# Altium PCB MB1419.PcbDoc (part 2 of 2)
Units mil, origin at the board's own origin, x right, y up, seen from the top; angles counter-clockwise.
Board outline 787.48 x 1614.17 mil, 4 copper layers (Top Layer, Signal Layer 3, Signal Layer 4, Bottom Layer), stack 43.307 mil thick; 117 components, 71 nets, 371 pads, 280 vias.
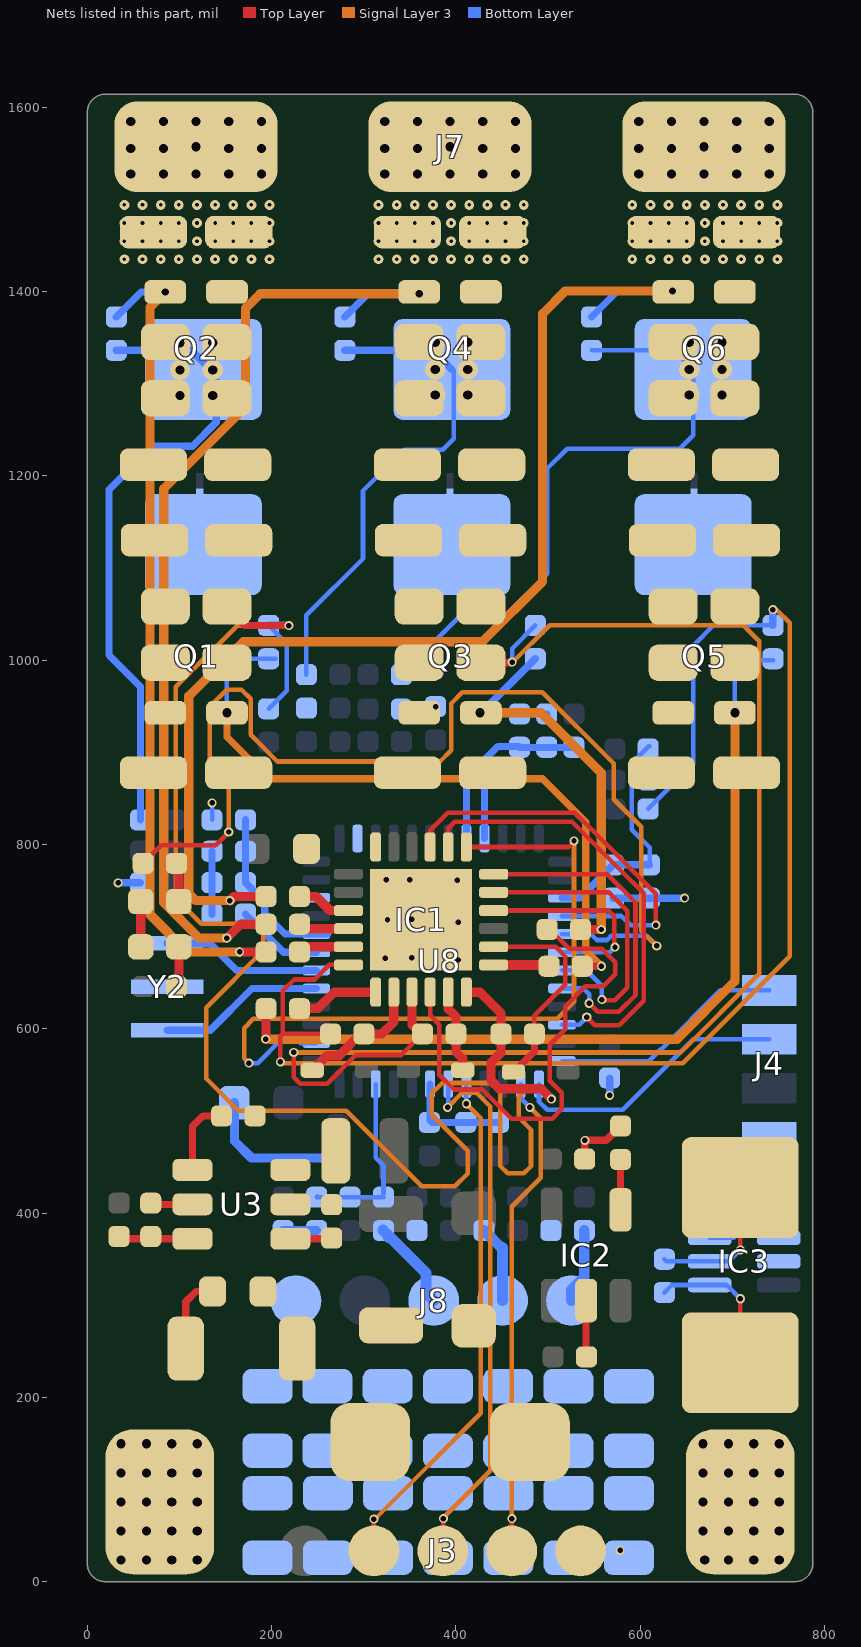
[diagram p4: the nets of this part, all layers, seen from the top]

## Via types
v1: diameter 10.63, hole 3.94, Top Layer to Bottom Layer, tented both sides, 108 vias
v2: diameter 22/22/22/22 (per signal layer), hole 10, Top Layer to Bottom Layer, tented both sides, 100 vias
v3: diameter 9.84, hole 5.91, Top Layer to Bottom Layer, tented both sides, 66 vias
v4: diameter 22, hole 10, Top Layer to Bottom Layer, tented both sides, 3 vias
v5: diameter 17.72, hole 7.87, Top Layer to Bottom Layer, tented both sides, 3 vias

## Nets (pads, with @x,y where several pads share a name; then routed paths per layer and width w, separated by ;. In a path a pad name is that pad's centre, name@x,y a point inside that pad or via, vN(x,y) a via of type N, cw(c..) or ccw(c..) an arc to the next point about the centre after c; other vN are vias at no path point) (continued)
GND: C4.2 C6.1 C18.2 C19.1 C20.2 C21.2 C23.2 C24.2 C25.2 C26.2 C27.1 C28.1 C29.1 C30.1 C31.1 C32.1 C33.1 C34.1 C35.1 C36.1 C37.1 C38.1 C39.1 C40.1 C41.2 C44.2 C45.1 C55.2 C63.2 C64.2 C66.2 C67.2 C68.2 C69.2 C70.2 D2.2 D4.C D5.C D7.A IC1.6 IC1.25 IC2.2 IC3.1 IC3.2 J3.5 J4.4 J6.1 J8.5 JP1.2 JP2.2 JP3.2 R33.1 R54.2 R55.2 R56.2 R60.2 R76.2 R80.1 R81.1 R82.1 U3.2 U8.49 Y2.2 | length 723.6
  Top Layer w5: J3.5@535,34 535.43,33.57 J3.5@535.43,33.46
  Top Layer w7.87: R33.1@68.9,410.83 70.26,409.47 U3.2@114.19,409.47 ; C44.2@106.89,252.95 106.89,303.74 118.11,314.96 C41.2@136.02,314.96 ; C63.2@539.8,458.66 539.8,478.8 v3(540,479) 563.28,479 C4.2@578.77,494.49 ; IC2.2@541.34,305.12 541.34,244.49 C64.2@541.73,244.09
  Top Layer w10: D5.C@58.07,688.98 D4.C@58.07,738.19
  Bottom Layer w7.87: v3(33.46,758.3) 33.7,758.53 R80.1@57.86,758.53 ; C21.2@135.43,724.41 C23.2@135.43,758.53 R76.2@135.43,792.65 ; C25.2@468.48,941.86 468.6,941.73 C25.2@469.14,941.73 C26.2@498.59,941.73 ; v3(566.93,527.84) C20.2@566.93,546.79 ; C66.2@570.87,741.73 R60.2@610.24,741.73 v3(648.25,741.73)
  Bottom Layer w10: C19.1@159.65,519.68 159.65,478.35 178.16,459.84 C18.2@271.65,459.84 ; C70.2@212.6,381.04 C69.2@248.91,381.04
  other v2: 36.59,23.62 64.15,23.62 91.71,23.62 119.27,23.62 36.59,55.12 64.15,55.12 91.71,55.12 119.27,55.12 36.59,86.61 64.15,86.61 91.71,86.61 119.27,86.61 36.59,118.11 64.15,118.11 91.71,118.11 119.27,118.11 36.59,149.61 64.15,149.61 91.71,149.61 119.27,149.61
  other v3: 578.31,34 402.45,674.67 323.54,676.49 352.3,676.95 402.62,715.5 325.82,718.24 351.88,718.7 324.59,761.53 349.75,761.71 401.42,761.25
GPIO_BEMF: R57.2 R58.2 R59.2 U8.43 | length 114.5
  Bottom Layer w7.87: U8.43@372.05,539.96 372.05,500.39 374.02,498.43 R58.2@410.7,498.43 R59.2@446.13,498.43
HO1: IC1.19 R5.1 | length 60.7
  Top Layer w7.87: R5.1@499.53,669.31 R5.1@500.99,667.86
  Top Layer w11: IC1.19@440.93,669.31 R5.1@499.53,669.31
HO2: IC1.16 R7.1 | length 545.1
  Top Layer w5: IC1.16@372.03,639.78 372.03,614.7 382.15,604.58 382.15,549.95 398,534.1 428.77,534.1 460.37,502.5 504.4,502.5 515.03,513.13 515.03,530.5 501.84,543.69 501.84,582.66 518.5,599.32 518.5,624 540.5,646 560,646 573,659 573,672.32 558.32,687 522.94,687 502.19,707.75 R7.1@499.05,707.75
HO3: IC1.13 R9.1 | length 92
  Top Layer w10: R9.1@228.35,622.05 250.28,622.05 268.01,639.78 IC1.13@312.98,639.78
LO1: IC1.11 R6.1 | length 55.4
  Top Layer w10: R6.1@230.31,683.43 235.88,688.99 IC1.11@283.45,688.99
LO2: IC1.10 R8.1 | length 58.2
  Top Layer w10: R8.1@225.2,708.68 264.84,708.68 IC1.10@283.45,708.68
LO3: IC1.9 R10.1 | length 59.4
  Top Layer w10: R10.1@230.31,743.51 248.22,743.51 263.37,728.36 IC1.9@283.45,728.36
NetC3_1: C3.1 L2.1 U3.6
NetC3_2: C3.2 U3.1 | length 83.6
  Top Layer w7.87: U3.1@114.19,446.87 114.19,494.19 125.51,505.51 C3.2@145.79,505.51
NetC4_1: C4.1 IC2.4 | length 54.7
  Top Layer w7.87: IC2.4@578.74,403.54 C4.1@578.77,458.27
NetC25_1: C25.1 C26.1 L1.2 U8.20 U8.21 | length 284.4
  Bottom Layer w7.87: U8.20@411.42,806.5 411.42,872.27 431.1,891.95 ; U8.21@431.1,806.5 431.1,891.95 ; L1.2@529.98,905.31 469.34,905.31 C25.1@469.14,905.51 468.18,906.47 445.62,906.47 431.1,891.95
NetD4_A: D4.A R28.2 | length 42.4
  Top Layer w10: R28.2@96.85,779.53 99.41,776.97 D4.A@99.41,738.19
NetD5_A: D5.A R29.2 | length 44.4
  Top Layer w10: R29.2@96.85,645.67 99.41,648.23 D5.A@99.41,688.98
NetIC3_6: IC3.6 R3.2 | length 77.2
  Bottom Layer w5: IC3.6@675.44,373.17 701.71,373.17 R3.2@737.75,409.2
NetJ8_1: J8.1 R74.1 | length 81.6
  Bottom Layer w11.81: J8.1@525.59,305.12 525.59,316.84 539.37,330.62 R74.1@539.37,381.04
NetJ8_2: J8.2 R75.1 | length 86.3
  Bottom Layer w11.81: R75.1@430.45,381.04 450.79,360.7 ; J8.2@450.79,305.12 450.79,362.7
NetJ8_3: J8.3 R77.2 | length 101.6
  Bottom Layer w11.81: R77.2@320.72,381.83 327.01,375.53 R77.2@327.01,373.71 ; R77.2@327.01,375.71 367.7,335.03 367.7,313.4 J8.3@375.98,305.12
NetQ1_1: Q1.1 R5.2 R35.1 | length 736.3
  Top Layer w7.87: R5.2@537.21,667.86 557.79,667.86 v3(557.85,667.91)
  Signal Layer 3 w7.87: v4(151.57,942.91) 151.57,916.73 196.9,871.4 494.1,871.4 541,824.5 541,684.76 v3(557.85,667.91)
  Bottom Layer w5: v4(151.57,942.91) 151.57,978.34 174.8,1001.57 R35.1@204.72,1001.57
NetQ2_1: Q2.1 R6.2 R39.1 | length 889.8
  Top Layer w10: v3(165.28,683.43) R6.2@194.09,683.43
  Signal Layer 3 w10: v5(84.65,1399.61) 68,1382.96 68,724 108.57,683.43 v3(165.28,683.43)
  Bottom Layer w7.87: R39.1@31.5,1372.44 58.66,1399.61 v5(84.65,1399.61)
NetQ3_1: Q3.1 R7.2 R41.1 | length 435
  Top Layer w10: R7.2@535.27,707.75 v3(557.74,707.75)
  Signal Layer 3 w10: v4(426.31,942.91) 492.44,942.91 557.74,877.62 v3(557.74,707.75)
  Bottom Layer w7.87: v4(426.31,942.91) 427.56,942.91 R41.1@486.22,1001.57
NetQ4_1: Q4.1 R8.2 R45.1 | length 1101
  Top Layer w10: v3(151.4,698.4) 166.47,713.47 R8.2@194.09,713.47
  Signal Layer 3 w10: v3(151.4,698.4) 121.6,698.4 83,737 83,1186 171.85,1274.85 171.85,1381.85 187.64,1397.64 v5(360.24,1397.64)
  Bottom Layer w7.87: R45.1@279.53,1372.44 304.72,1397.64 v5(360.24,1397.64)
NetQ5_1: Q5.1 R9.2 R48.1 | length 951.9
  Top Layer w7.87: v3(193.66,588.72) v3@194.09,588.72
  Top Layer w10: v3@194.09,588.72 R9.2@194.09,621.89
  Signal Layer 3 w10: v3(193.66,588.72) 639.91,588.72 702.76,651.57 v4(702.76,942.91)
  Bottom Layer w5: v4(702.76,942.91) 702.76,988.75 714.01,1000 R48.1@744.09,1000
NetQ6_1: Q6.1 R10.2 R52.1 | length 1280
  Top Layer w7.87: v3(154.66,739.18) v3@154.8,739.04
  Top Layer w10: v3@154.83,739.04 159.31,743.51 R10.2@194.09,743.51
  Signal Layer 3 w10: v3(154.66,739.18) 117.82,739.18 110.1,746.9 110.1,961 169.17,1020.07 428.78,1020.07 494.1,1085.39 494.1,1376.1 518.68,1400.68 v5(634.99,1400.68)
  Bottom Layer w7.87: R52.1@547.24,1372.44 575.49,1400.68 v5(634.99,1400.68)
NetR2_1: R2.1 U3.4 | length 45.5
  Top Layer w7.87: U3.4@220.49,372.07 263.23,372.07 R2.1@265.22,370.08
NetR30_2: R30.2 R33.2 U3.3 | length 80.8
  Top Layer w7.87: R30.2@34.45,374.61 36.99,372.07 U3.3@114.19,372.07
NetU8_5: U8.5 Y2.1 | length 180.8
  Bottom Layer w7.87: Y2.1@86.61,598.43 133.43,598.43 178.7,643.7 U8.5@248.62,643.7
NetU8_6: U8.6 Y2.3 | length 174.2
  Bottom Layer w7.87: Y2.3@86.61,692.91 132.82,692.91 162.35,663.39 202.76,663.39 U8.6@248.62,663.39
NRST: C21.1 U8.7 | length 94.1
  Bottom Layer w7.87: C21.1@171.65,724.41 212.99,683.07 U8.7@248.62,683.07
OP1_OUT: U8.10
OP2_OUT: U8.14
"PA0 - BUSV": C23.1 R68.2 R76.1 U8.8 | length 188.6
  Bottom Layer w7.87: R68.2@171.65,826.77 R76.1@171.65,792.65 C23.1@171.65,758.53 192.51,737.68 192.51,724.82 214.57,702.76 U8.8@261.33,702.76
PC13-UL: IC1.1 U8.2 | length 790.4
  Top Layer w5: IC1.1@411.4,797.26 522.26,797.26 528.6,803.6 v3(528.2,804)
  Signal Layer 3 w5: v3(175.29,562.82) 170.19,567.93 170.19,600.81 180.27,610.9 509.9,610.9 528.2,629.2 v3(528.2,804)
  Bottom Layer w5: v3(175.29,562.82) 184.87,562.82 210.24,588.19 227.6,588.19 231.14,584.65 U8.2@248.62,584.65
PWM: J3.4 U8.38 | length 532.1
  Top Layer w5: J3.4@460.63,33.46 460.63,33.37 461,33 459.18,33 460.78,34.6 460.78,68.5 v3(460.86,68.5)
  Signal Layer 3 w5: v3(460.86,68.5) 460.86,70.39 460.74,70.51 460.74,407.1 491.97,438.33 491.97,503.05 v3(480.33,514.69)
  Bottom Layer w5: U8.38@470.47,539.96 470.47,524.5 v3@480.28,514.69
STATUS: R28.1 U8.29 | length 1175.3
  Top Layer w5: R28.1@60.63,779.53 80.1,799 139.28,799 153.71,813.42 v3(153.54,813.59)
  Signal Layer 3 w5: v3(153.54,813.59) 153.54,863.26 133.1,883.7 133.1,949.7 151.5,968.1 167.4,968.1 177.35,958.15 177.35,919.02 206.26,890.1 382.8,890.1 394.8,902.1 394.8,953 407.07,965.26 493.84,965.26 571.21,887.9 571.21,849.18 601.3,819.09 601.3,706.1 617.4,690 v3(618,690)
  Bottom Layer w5: U8.29@515.16,702.76 546.67,702.76 553.04,696.39 564.33,696.39 568.8,700.86 607.14,700.86 v3(618,690)
SWCLK: J4.2 U8.37 | length 304.5
  Bottom Layer w5: U8.37@490.16,539.96 490.16,520.88 499.04,512 581,512 657.58,588.58 J4.2@740.16,588.58
SWDIO: J4.1 U8.36 | length 256.6
  Bottom Layer w5: U8.36@515.16,564.96 609.46,564.96 622.15,577.65 ; 622.55,577.25 687.02,641.73 J4.1@740.16,641.73
"Temperature feedback": C66.1 R60.1 RT1.2 U8.27 | length 255.2
  Bottom Layer w5: RT1.2@610.11,906.67 609.29,906.67 590.81,888.19 590.81,816.19 610.24,796.76 R60.1@610.24,777.95
  Bottom Layer w7.87: U8.27@515.16,742.13 535.04,742.13 C66.1@570.87,777.95 R60.1@610.24,777.95
UH: IC1.22 U8.30 | length 227.6
  Top Layer w5: IC1.22@440.93,728.36 565.64,728.36 572,722 572,688.69 v3(572.69,688.69)
  Bottom Layer w5: U8.30@515.16,683.07 567.07,683.07 572,688 v3(572.69,688.69)
USART2_RX: J3.3 U8.42 | length 588.7
  Top Layer w5: J3.3@385.83,33.46 386.35,33.99 v3(386.35,68.5)
  Signal Layer 3 w5: v3(386.35,68.5) 386.35,69.52 386.52,69.52 437.52,120.52 437.52,515.68 422.3,530.9 407.14,530.9 v3(391,514.76)
  Bottom Layer w5: v3(391,514.76) 391,516 391.73,516.73 U8.42@391.73,539.96
USART2_TX: J3.2 U8.41 | length 561.8
  Top Layer w5: v3(310.96,68.02) 311.05,67.92 J3.2@311.05,33.5
  Signal Layer 3 w5: v3(310.96,68.02) 312.22,68.02 427,182.8 427,503.12 v3(411.42,518.7)
  Bottom Layer w5: v3(411.42,518.7) U8.41@411.42,539.96
V+: C5.2 IC3.5 Q1.7 Q1.8 Q1.9 Q1.10 Q3.7 Q3.8 Q3.9 Q3.10 Q5.7 Q5.8 Q5.9 Q5.10 R1.2 R68.1 | length 174.8
  Top Layer w5: R1.2@708.64,427.74 708.64,360.21 v3(708.81,360.05)
  Bottom Layer w5: R68.1@135.43,826.77 v3(135.43,845.12) ; C5.2@626.23,349.94 628.59,347.57 IC3.5@675.44,347.57 696.33,347.57 v3(708.81,360.05)
VB1: C7.1 D6.C IC1.20 | length 230.9
  Top Layer w5: IC1.20@440.93,688.99 508.31,688.99 518.84,678.46 518.84,647.84 485.2,614.2 C7.1@485.2,596.06
  Top Layer w7.87: D6.C@462.58,553.13 485.2,575.76 C7.1@485.2,596.06
VB2: C8.1 D8.C IC1.17 | length 91.2
  Top Layer w10: IC1.17@391.72,639.78 391.72,621.58 400,613.3 C8.1@400,594.49 400,575.16 407.5,567.66 D8.C@407.5,555.13
VB3: C9.1 D9.C IC1.14 | length 142.7
  Top Layer w10: D9.C@244.08,555.1 259.84,570.87 273.24,570.87 296.86,594.49 C9.1@300.18,594.49 319.89,594.49 332.66,607.26 IC1.14@332.66,639.78
VBAT: C5.1 C27.2 C28.2 C29.2 C30.2 C31.2 C32.2 C33.2 C34.2 C35.2 C36.2 C37.2 C38.2 C39.2 C40.2 C41.1 C44.1 D2.1 IC3.4 J5.1 R1.1 R2.2 U3.5 | length 161.5
  Top Layer w5: R1.1@708.64,237.58 v3(708.66,307.09)
  Bottom Layer w5: C5.1@626.23,313.72 634.5,321.98 IC3.4@675.44,321.98 693.76,321.98 v3(708.66,307.09)
  other v2: 670.13,23.62 695.72,23.62 723.28,23.62 750.84,23.62 668.17,55.12 695.72,55.12 723.28,55.12 750.84,55.12 668.17,86.61 695.72,86.61 723.28,86.61 750.84,86.61 668.17,118.11 695.72,118.11 723.28,118.11 750.84,118.11 668.17,149.61 695.72,149.61 723.28,149.61 750.84,149.61
VH: IC1.23 U8.31 | length 335.8
  Top Layer w5: IC1.23@440.93,748.05 IC1.23@440.93,748.05 504.36,748 566,748 585.94,728.06 585.94,644.44 572.5,631 558.36,631 v3(558.36,631.63)
  Bottom Layer w5: U8.31@515.16,663.39 541.61,663.39 558.36,646.64 v3(558.36,631.63)
VL: IC1.2 U8.34 | length 490.9
  Top Layer w5: IC1.2@391.72,797.26 391.72,817.72 398.89,824.89 526.02,824.89 579.11,771.81 603.81,747.11 603.81,630.61 577.2,604 550.66,604 v3(542,612.66)
  Bottom Layer w5: U8.34@515.16,604.33 533.67,604.33 v3(542,612.66)
VS1: C7.2 IC1.18 J7.3 Q1.2 Q1.3 Q1.4 Q1.5 Q1.6 Q2.7 Q2.8 Q2.9 Q2.10 R4.2 R35.2 | length 1841.3
  Top Layer w7.87: Q1.3@153.49,1054.79 170.75,1037.54 v3(218.87,1037.54)
  Top Layer w10: IC1.18@411.4,639.78 426.13,639.78 448.98,616.93 C7.2@448.98,596.06 ; C7.2@448.98,594.49 448.98,573.98 438.1,563.1 438.1,543.9 447.09,534.91 492.66,534.91 503.59,523.98 v3(503.59,523.68)
  Signal Layer 3 w5: v3(218.87,1037.54) 162.54,1037.54 96,971 96,741.3 123.5,713.8 181.84,713.8 191.02,704.62 191.02,685.02 129,623 129,546.1 164.1,511 281,511 362.9,429.1 399,429.1 412.9,443 412.9,467.8 374,506.7 374,530.1 385.1,541.2 437.3,541.2 448.1,530.4 448.1,451.1 456.1,443.1 473.64,443.1 481.5,450.96 481.5,490.5 468.1,503.9 468.1,526.2 475.9,534 494.3,534 503.6,524.7 v3(503.59,523.68)
  Bottom Layer w5: R4.2@196.85,947.24 216.54,966.93 216.54,1018.11 R35.2@196.85,1037.8
  Bottom Layer w7.87: R35.2@196.85,1037.8 218.61,1037.8 v3(218.87,1037.54)
  other v1: 40.28,1435.02 59.96,1435.02 79.65,1435.02 99.33,1435.02 119.02,1435.02 138.7,1435.02 158.39,1435.02 178.07,1435.02 197.76,1435.02 40.28,1454.71 59.96,1454.71 79.65,1454.71 99.33,1454.71 119.02,1454.71 138.7,1454.71 158.39,1454.71 178.07,1454.71 197.76,1454.71 40.28,1474.39 59.96,1474.39 79.65,1474.39 99.33,1474.39 119.02,1474.39 138.7,1474.39 158.39,1474.39 178.07,1474.39 197.76,1474.39 40.28,1494.08 59.96,1494.08 79.65,1494.08 99.33,1494.08 119.02,1494.08 138.7,1494.08 158.39,1494.08 178.07,1494.08 197.76,1494.08
  other v2: 47.24,1527.56 82.68,1527.56 118.11,1527.56 153.54,1527.56 188.98,1527.56 47.24,1555.12 82.68,1555.12 153.54,1555.12 188.98,1555.12 47.24,1584.65 82.68,1584.65 118.11,1584.65 153.54,1584.65 188.98,1584.65
VS2: C8.2 IC1.15 J7.2 Q3.2 Q3.3 Q3.4 Q3.5 Q3.6 Q4.7 Q4.8 Q4.9 Q4.10 R11.2 R41.2 | length 1519.8
  Top Layer w5: v3(224.07,574.33) 224.07,547.56 231.23,540.4 260.27,540.4 291.47,571.6 340.89,571.6 C8.2@363.78,594.49
  Top Layer w7.87: Q3.2@427.17,997.24 461.11,997.24 v3(461.11,997.86)
  Top Layer w10: IC1.15@352.35,639.78 352.35,604.35 C8.2@362.2,594.49
  Signal Layer 3 w5: v3(224.07,574.33) 643.83,574.33 729.3,659.8 729.3,1020.5 711.8,1038 501.86,1038 461.42,997.55 v3(461.11,997.86)
  Bottom Layer w5: v3(461.11,997.86) 461.11,1012.68 R41.2@486.22,1037.8
  other v1: 316.08,1435.02 335.76,1435.02 355.45,1435.02 375.13,1435.02 394.82,1435.02 414.5,1435.02 434.19,1435.02 453.87,1435.02 473.56,1435.02 316.08,1454.71 335.76,1454.71 355.45,1454.71 375.13,1454.71 394.82,1454.71 414.5,1454.71 434.19,1454.71 453.87,1454.71 473.56,1454.71 316.08,1474.39 335.76,1474.39 355.45,1474.39 375.13,1474.39 394.82,1474.39 414.5,1474.39 434.19,1474.39 453.87,1474.39 473.56,1474.39 316.08,1494.08 335.76,1494.08 355.45,1494.08 375.13,1494.08 394.82,1494.08 414.5,1494.08 434.19,1494.08 453.87,1494.08 473.56,1494.08
  other v2: 322.83,1527.56 358.27,1527.56 393.7,1527.56 429.13,1527.56 464.57,1527.56 322.83,1555.12 358.27,1555.12 429.13,1555.12 464.57,1555.12 322.83,1584.65 358.27,1584.65 393.7,1584.65 429.13,1584.65 464.57,1584.65
  other v3: 377.95,949.61
VS3: C9.2 IC1.12 J7.1 Q5.2 Q5.3 Q5.4 Q5.5 Q5.6 Q6.7 Q6.8 Q6.9 Q6.10 R12.2 R48.2 | length 1512.2
  Top Layer w5: v3(209.54,564.08) 209.54,591.93 212.1,594.49 ; C9.2@263.96,594.49 212.1,594.49 ; IC1.12@283.45,669.31 262.41,669.31 246.64,653.54 224.41,653.54 212.1,641.23 212.1,594.49
  Signal Layer 3 w5: v3(209.54,564.08) 209.54,562.58 646.38,562.58 762.49,678.69 762.49,1040.42 747.98,1054.94 v3(743.99,1054.94)
  Bottom Layer w5: R12.2@608.66,838.58 657.48,887.4 657.48,1015.75 679.53,1037.8 R48.2@744.09,1037.8
  Bottom Layer w7.87: v3(743.99,1054.94) 743.99,1037.9 R48.2@744.09,1037.8
  other v1: 591.46,1435.02 611.14,1435.02 630.83,1435.02 650.51,1435.02 670.2,1435.02 689.88,1435.02 709.57,1435.02 729.25,1435.02 748.94,1435.02 591.46,1454.71 611.14,1454.71 630.83,1454.71 650.51,1454.71 670.2,1454.71 689.88,1454.71 709.57,1454.71 729.25,1454.71 748.94,1454.71 591.46,1474.39 611.14,1474.39 630.83,1474.39 650.51,1474.39 670.2,1474.39 689.88,1474.39 709.57,1474.39 729.25,1474.39 748.94,1474.39 591.46,1494.08 611.14,1494.08 630.83,1494.08 650.51,1494.08 670.2,1494.08 689.88,1494.08 709.57,1494.08 729.25,1494.08 748.94,1494.08
  other v2: 598.43,1527.56 633.86,1527.56 669.29,1527.56 704.72,1527.56 740.16,1527.56 598.43,1555.12 633.86,1555.12 704.72,1555.12 740.16,1555.12 598.43,1584.65 633.86,1584.65 669.29,1584.65 704.72,1584.65 740.16,1584.65
"Vshunt_1 +": Q2.2 Q2.3 Q2.4 Q2.5 Q2.6 R39.2 R54.1 R67.2 | length 683.2
  Bottom Layer w7.87: R39.2@31.5,1336.22 112.78,1336.22 R54.1@140,1309 ; R67.2@57.86,826.77 57.86,971.28 23.62,1005.51 23.62,1185.04 70.87,1232.28 114.17,1232.28 140,1258.11 140,1281.44 R54.1@139.98,1302.4
  other v2: 100.63,1287.35 136.06,1287.35 100.63,1314.91 136.06,1314.91 100.63,1344.43 136.06,1344.43
"Vshunt_2 +": Q4.2 Q4.3 Q4.4 Q4.5 Q4.6 R45.2 R55.1 R69.2 | length 546.2
  Bottom Layer w5: R69.2@237.8,984.25 237.8,1048.82 299.21,1110.24 299.21,1183.66 343.9,1228.35 385.83,1228.35 397.64,1240.16 R55.1@397.64,1314.96
  Bottom Layer w7.87: R45.2@279.53,1336.22 375,1336.22 R55.1@395.67,1315.55
  other v2: 377.57,1287.91 413,1287.91 377.57,1315.46 413,1315.46 377.57,1344.99 413,1344.99
"Vshunt_3 +": Q6.2 Q6.3 Q6.4 Q6.5 Q6.6 R52.2 R56.1 R70.2 | length 681.3
  Bottom Layer w5: R70.2@340.94,984.25 405.51,1048.82 454.33,1048.82 498.94,1093.43 498.94,1207.6 520.75,1229.41 642.8,1229.41 657.48,1244.09 R56.1@657.48,1315.55 636.81,1336.22 R52.2@547.24,1336.22
  other v2: 653.31,1287.91 688.75,1287.91 653.31,1315.46 688.75,1315.46 653.31,1344.99 688.75,1344.99
WH: IC1.24 U8.32 | length 370.7
  Top Layer w5: IC1.24@440.93,767.73 527.2,767.73 564.48,767.73 594.87,737.34 594.87,636.47 576.79,618.39 554.02,618.39 v3(544.7,627.71)
  Bottom Layer w5: U8.32@515.16,643.7 538.3,643.7 544.7,637.3 v3(544.7,627.71)
WL: IC1.3 U8.28 | length 447.7
  Top Layer w5: IC1.3@372.03,797.26 372.03,815.34 391.02,834.33 529.22,834.33 617,746.56 617,734.35 v3(617,712.46)
  Bottom Layer w5: U8.28@515.16,722.44 579.56,722.44 589.78,712.22 617,712.22 v3(617,712.46)
Z+/H3: C69.1 R73.1 R77.1 U8.46 | length 196.2
  Bottom Layer w5: C69.1@249.85,418.2 C69.1@248.91,417.26 R73.1@285.21,417.26 R77.1@321.52,417.26 ; U8.46@312.99,539.96 312.99,460.01 321.52,451.48 R77.1@321.52,421.26
pads on no net: IC1.5 IC1.7 IC1.8 IC1.21 U8.3 U8.4 U8.18 U8.25 U8.26 U8.33 U8.39 U8.40 U8.47

## Polygon pours and split planes (outlines as drawn)
no net on Top Solder "Top Solder-No Net" (solid): 42 vertices, not listed, extent 507.87,2.95 562.99,62.01
no net on Top Solder "Top Solder-No Net" (solid): 42 vertices, not listed, extent 433.07,2.95 488.19,62.01
no net on Top Solder "Top Solder-No Net" (solid): 42 vertices, not listed, extent 358.27,2.95 413.39,62.01
no net on Top Solder "Top Solder-No Net" (solid): 42 vertices, not listed, extent 283.46,2.95 338.58,62.01
no net on Top Solder "Top Solder-No Net" (solid): 42 vertices, not listed, extent 208.66,3.94 263.78,62.99
GND on Signal Layer 4 "NONET_L-01_P-001" (solid, remove dead copper, pour order 281): 0,1614.17 0,0 787.4,0 787.4,1614.17
VS3 on Signal Layer 4 "NONET_L-01_P-001" (solid, pour order 280): 576.77,1440.94 ccw(c592.52,1440.94) 592.52,1425.2 753.94,1425.2 ccw(c753.94,1440.94) 769.69,1440.94 769.69,1598.43 ccw(c753.94,1598.43) 753.94,1614.17 592.52,1614.17 ccw(c592.52,1598.43) 576.77,1598.43
VS1 on Signal Layer 4 "NONET_L-01_P-001" (solid, pour order 275): 23.62,1440.94 ccw(c39.37,1440.94) 39.37,1425.2 200.79,1425.2 ccw(c200.79,1440.94) 216.54,1440.94 216.54,1598.43 ccw(c200.79,1598.43) 200.79,1614.17 39.37,1614.17 ccw(c39.37,1598.43) 23.62,1598.43
VS2 on Signal Layer 4 "NONET_L-01_P-001" (solid, pour order 279): 297.24,1440.94 ccw(c312.99,1440.94) 312.99,1425.2 474.41,1425.2 ccw(c474.41,1440.94) 490.16,1440.94 490.16,1598.43 ccw(c474.41,1598.43) 474.41,1614.17 312.99,1614.17 ccw(c312.99,1598.43) 297.24,1598.43
VBAT on Signal Layer 4 "NONET_L-01_P-001" (solid, pour order 272): 641.73,157.48 cw(c657.48,157.48) 657.48,173.23 767.72,173.23 cw(c767.72,161.42) 779.53,161.42 779.53,15.75 cw(c767.72,15.75) 767.72,3.94 653.54,3.94 cw(c653.54,15.75) 641.73,15.75 641.73,70.87
V+ on Bottom Solder "Bottom Solder-V+" (solid): 659.45,161.42 659.45,3.94 765.75,3.94 765.75,161.42 659.45,161.42
no net on Bottom Solder "BOTTOM_N16851489_P497" (solid): 82 vertices, not listed, extent 423.23,277.56 478.35,332.68
no net on Bottom Solder "BOTTOM_N16851515_P495" (solid): 82 vertices, not listed, extent 348.43,277.56 403.54,332.68
no net on Bottom Solder "BOTTOM_N168514550_P492" (solid): 64 vertices, not listed, extent 498.03,277.56 553.15,332.68
no net on Bottom Solder "BOTTOM_GND_P496" (solid): 82 vertices, not listed, extent 198.82,277.56 253.94,332.68
no net on Bottom Solder "BOTTOM_5V_ESC_P494" (solid): 82 vertices, not listed, extent 273.62,277.56 328.74,332.68
no net on Bottom Solder "Bottom Solder-No Net" (solid): 7.87,161.42 7.87,3.94 114.17,3.94 114.17,161.42 7.87,161.42
GND on Bottom Layer "NONET_L-01_P-001" (solid, remove dead copper, pour order 242): 0,1614.17 787.4,1614.17 787.4,0 0,0
+3.3V on Bottom Layer "NONET_L-01_P-001" (solid, pour order 269): 275.59,570.87 cw(c275.59,562.99) 283.46,562.99 283.46,488.19 cw(c279.53,488.19) 279.53,484.25 204.72,484.25 cw(c204.72,492.13) 196.85,492.13 196.85,555.12 cw(c212.6,555.12) 212.6,570.87
VBAT on Bottom Layer "VBAT_L04_P048" (solid, pour order 48): 610.24,74.8 133.86,74.8 133.86,165.35 779.53,165.35 779.53,3.94 618.11,3.94 618.11,66.93
GND on Bottom Layer "GND_L04_P026" (solid, pour order 26): 7.87,3.94 614.17,3.94 614.17,59.06 122.05,59.06 114.17,66.93 114.17,165.35 122.05,173.23 653.54,173.23 665.35,185.04 665.35,230.31 655.51,240.16 59.06,240.16 7.87,240.16 7.87,224.41
VS3 on Bottom Layer "NONET_L-01_P-001" (solid, pour order 239): 551.18,1614.17 551.18,1613.38 551.18,1421.26 767.72,1421.26 767.72,1614.17
VS2 on Bottom Layer "NONET_L-01_P-001" (solid, pour order 238): 287.4,1610.24 287.4,1609.45 287.4,1417.32 496.06,1417.32 496.06,1610.24
VS1 on Bottom Layer "NONET_L-01_P-001" (solid, pour order 237): 15.75,1610.24 15.75,1609.45 15.75,1417.32 224.41,1417.32 224.41,1610.24
GND on Bottom Layer "GND_L04_P028" (solid, pour order 28): 82 vertices, not listed, extent 198.82,277.56 253.94,332.68
+3.3V on Bottom Layer "+3.3V_L04_P010" (solid, pour order 10): 82 vertices, not listed, extent 273.62,277.56 328.74,332.68
NetJ8_1 on Bottom Layer "NETJ8_1_L04_P036" (solid, pour order 36): 64 vertices, not listed, extent 498.03,277.56 553.15,332.68
NetJ8_3 on Bottom Layer "NETJ8_3_L04_P038" (solid, pour order 38): 82 vertices, not listed, extent 348.43,277.56 403.54,332.68
NetJ8_2 on Bottom Layer "NETJ8_2_L04_P040" (solid, pour order 40): 82 vertices, not listed, extent 423.23,277.56 478.35,332.68
GND on Top Layer "NONET_L-01_P-001" (solid, remove dead copper, pour order 270): 0,0 0,905.51 787.4,905.51 787.4,0
V+ on Top Layer "NONET_L-01_P-001" (solid, pour order 265): 7.87,850.39 ccw(c19.68,850.39) 19.68,838.58 767.72,838.58 ccw(c767.72,850.39) 779.53,850.39 779.53,909.45 ccw(c771.65,909.45) 771.65,917.32 15.75,917.32 ccw(c15.75,909.45) 7.87,909.45
VS2 on Top Layer "NONET_L-01_P-001" (solid, pour order 262): 284.31,1586.61 cw(c304.97,1587.6) 303.99,1608.27 507.22,1608.27 cw(c507.23,1585.5) 530,1585.48 530,939 cw(c512.28,938.98) 512.26,921.26 300.06,921.26 cw(c300.05,937) 284.31,937.01
VS1 on Top Layer "NONET_L-01_P-001" (solid, pour order 261): 10,1586.61 cw(c31.65,1586.61) 31.65,1608.27 255.91,1608.27 cw(c256.9,1585.64) 279.53,1586.61 279.53,937.01 cw(c263.79,936.99) 263.78,921.26 25.75,921.26 cw(c25.74,937) 10,937.01
VS3 on Top Layer "NONET_L-01_P-001" (solid, pour order 253): 535,1586.61 cw(c556.65,1586.61) 556.65,1608.27 759.84,1608.27 cw(c758.86,1587.6) 779.53,1586.61 779.53,937.01 cw(c763.79,937) 763.78,921.26 551.74,921.26 cw(c551.74,938) 535,938
V+ on Top Layer "NONET_L-01_P-001" (solid, pour order 266): 767.72,370.08 ccw(c767.72,381.89) 779.53,381.89 779.53,850.39 ccw(c771.65,850.39) 771.65,858.27 645.67,858.27 ccw(c645.67,850.39) 637.8,850.39 637.8,381.89 ccw(c649.61,381.89) 649.61,370.08
+3.3V on Top Layer "NONET_L-01_P-001" (solid, pour order 267): 515.75,377.95 ccw(c515.75,381.89) 519.69,381.89 519.69,480.32 ccw(c515.75,480.32) 515.75,484.25 492.13,484.25 ccw(c492.13,480.32) 488.19,480.32 488.19,381.89 ccw(c492.13,381.89) 492.13,377.95
VBAT on Top Layer "NONET_L-01_P-001" (solid, pour order 264): 29 vertices, not listed, extent 165.35,106.3 653.54,421.26
VBAT on Top Layer "NONET_L-01_P-001" (solid, pour order 263): 641.73,287.4 cw(c649.61,287.4) 649.61,295.28 767.72,295.28 cw(c767.72,287.4) 775.59,287.4 775.59,19.68 cw(c759.84,19.68) 759.84,3.94 657.48,3.94 cw(c657.48,19.68) 641.73,19.68
V+ on Top Layer "Top Layer-V+" (solid, pour order 252): 748.03,1111.61 592.91,1111.61 cw(c592.91,1117.52) 587.01,1117.52 587.01,1143.11 cw(c592.91,1143.11) 592.91,1149.02 628.35,1149.02 768.31,1149.02 cw(c768.31,1137.8) 779.53,1137.8 779.53,1116.14 cw(c775.9,1116.14) 779.53,1116.11 779.53,909.45 cw(c775.59,909.45) 775.59,905.51 761.81,905.51 cw(c761.81,909.45) 757.87,909.45 757.87,1101.77 ccw(c745.59,1099.33)
V+ on Top Layer "Top Layer-V+" (solid, pour order 260): 41.34,1111.61 196.46,1111.61 ccw(c196.46,1117.52) 202.36,1117.52 202.36,1143.11 ccw(c196.46,1143.11) 196.46,1149.02 161.02,1149.02 21.06,1149.02 ccw(c21.06,1137.8) 9.84,1137.8 9.84,1116.14 ccw(c13.48,1116.14) 9.84,1116.11 9.84,909.45 ccw(c13.78,909.45) 13.78,905.51 27.56,905.51 ccw(c27.56,909.45) 31.5,909.45 31.5,1101.77 cw(c43.78,1099.34)
"Vshunt_1 +" on Top Layer "NONET_L-01_P-001" (solid, pour order 258): 64.96,1263.78 cw(c64.96,1271.65) 57.09,1271.65 57.09,1370.08 cw(c68.9,1370.08) 68.9,1381.89 110.24,1381.89 ccw(c111.22,1386.81) 116.14,1385.83 116.14,1407.48 cw(c122.05,1407.48) 122.05,1413.39 171.26,1413.39 cw(c171.26,1405.52) 179.13,1405.51 179.13,1271.65 cw(c172.25,1270.67) 173.23,1263.78
V+ on Top Layer "Top Layer-V+" (solid, pour order 257): 316.93,1111.61 472.05,1111.61 ccw(c472.05,1117.52) 477.95,1117.52 477.95,1143.11 ccw(c472.05,1143.11) 472.05,1149.02 436.61,1149.02 296.65,1149.02 ccw(c296.65,1137.8) 285.43,1137.8 285.43,1116.14 ccw(c289.07,1116.14) 285.43,1116.11 285.43,909.45 ccw(c289.37,909.45) 289.37,905.51 303.15,905.51 ccw(c303.15,909.45) 307.09,909.45 307.09,1101.77 cw(c319.37,1099.34)
"Vshunt_2 +" on Top Layer "NONET_L-01_P-001" (solid, pour order 256): 340.55,1263.78 cw(c340.55,1271.65) 332.68,1271.65 332.68,1370.08 cw(c344.49,1370.08) 344.49,1381.89 385.83,1381.89 ccw(c386.81,1386.81) 391.73,1385.83 391.73,1407.48 cw(c397.64,1407.48) 397.64,1413.39 446.85,1413.39 cw(c446.85,1405.52) 454.72,1405.51 454.72,1271.65 cw(c447.84,1270.67) 448.82,1263.78
"Vshunt_3 +" on Top Layer "NONET_L-01_P-001" (solid, pour order 246): 616.14,1263.78 cw(c616.14,1271.65) 608.27,1271.65 608.27,1370.08 cw(c620.08,1370.08) 620.08,1381.89 661.42,1381.89 ccw(c662.4,1386.81) 667.32,1385.83 667.32,1407.48 cw(c673.23,1407.48) 673.23,1413.39 722.44,1413.39 cw(c722.44,1405.51) 730.31,1405.51 730.31,1271.65 cw(c723.43,1270.66) 724.41,1263.78
NetC3_1 on Top Layer "NONET_L-01_P-001" (solid, pour order 245): 164.57,511.81 cw(c172.44,511.81) 172.44,519.68 278.74,519.68 cw(c278.74,511.81) 286.61,511.81 286.61,437.01 cw(c278.74,437.01) 278.74,429.13 172.44,429.13 cw(c172.44,437.01) 164.57,437.01
+10V on Top Layer "NONET_L-01_P-001" (solid, pour order 241): 22 vertices, not listed, extent 291.34,232.28 519.69,503.94
GND on Top Layer "GND_L01_P090" (solid, pour order 90): 16.94,167.35 16.94,5.94 138.98,5.94 138.98,167.35
+3.3V on Top Layer "+3.3V_L01_P233" (solid, pour order 233): 42 vertices, not listed, extent 208.66,3.94 263.78,62.99
PWM on Top Layer "PWM_L01_P232" (solid, pour order 232): 42 vertices, not listed, extent 433.07,2.95 488.19,62.01
GND on Top Layer "GND_L01_P084" (solid, pour order 84): 42 vertices, not listed, extent 507.87,2.95 562.99,62.01
USART2_TX on Top Layer "USART2_TX_L01_P078" (solid, pour order 78): 42 vertices, not listed, extent 283.46,2.95 338.58,62.01
USART2_RX on Top Layer "USART2_RX_L01_P076" (solid, pour order 76): 42 vertices, not listed, extent 358.27,2.95 413.39,62.01
GND on Signal Layer 3 "NONET_L-01_P-001" (solid, pour order 278): 0,1614.17 0,0 787.4,0 787.4,1614.17
VS1 on Signal Layer 3 "NONET_L-01_P-001" (solid, pour order 274): 23.62,1437.01 ccw(c39.37,1437.01) 39.37,1421.26 200.79,1421.26 ccw(c200.79,1437.01) 216.54,1437.01 216.54,1594.49 ccw(c200.79,1594.49) 200.79,1610.24 39.37,1610.24 ccw(c39.37,1594.49) 23.62,1594.49
VS3 on Signal Layer 3 "NONET_L-01_P-001" (solid, pour order 277): 576.77,1437.01 ccw(c592.52,1437.01) 592.52,1421.26 753.94,1421.26 ccw(c753.94,1437.01) 769.69,1437.01 769.69,1594.49 ccw(c753.94,1594.49) 753.94,1610.24 592.52,1610.24 ccw(c592.52,1594.49) 576.77,1594.49
VS2 on Signal Layer 3 "NONET_L-01_P-001" (solid, pour order 276): 297.24,1437.01 ccw(c312.99,1437.01) 312.99,1421.26 474.41,1421.26 ccw(c474.41,1437.01) 490.16,1437.01 490.16,1594.49 ccw(c474.41,1594.49) 474.41,1610.24 312.99,1610.24 ccw(c312.99,1594.49) 297.24,1594.49
VBAT on Signal Layer 3 "NONET_L-01_P-001" (solid, pour order 271): 641.73,157.48 cw(c657.48,157.48) 657.48,173.23 767.72,173.23 cw(c767.72,161.42) 779.53,161.42 779.53,15.75 cw(c767.72,15.75) 767.72,3.94 653.54,3.94 cw(c653.54,15.75) 641.73,15.75 641.73,70.87

## Keep-outs
Keep-Out Layer:
  lines w3.94: -0.07,206.69 -0.07,918.31 ; 0,206.69 0,19.68 ccw(c19.68,19.68) 19.68,0 767.72,0 ccw(c767.72,19.68) 787.4,19.69 787.4,1594.49 ccw(c767.72,1594.49) 767.72,1614.17 19.68,1614.17 ccw(c19.68,1594.49) 0,1594.49 0,917.32

## Silkscreen, mask and mechanical layers (free items; w line width, h text height)
Top Overlay:
  drawing of 17 lines, arcs and shapes, not listed
Bottom Overlay:
  lines w5.91: 267.72,269.68 267.72,342.52 ; 289.37,269.68 192.91,269.68 192.91,342.52 566.93,342.52 566.93,269.68 407.48,269.68 ; 342.52,269.68 342.52,342.52 ; 417.32,269.68 417.32,342.52 ; 492.13,269.68 492.13,342.52 ; 547.24,342.52 566.93,322.83 566.93,328.74 553.15,342.52 559.06,342.52 566.93,334.65 ; 566.93,277.56 559.06,269.68 549.21,269.68 ; 740.16,445.18 773.62,445.18 ; 740.16,447.15 773.62,447.15 ; 740.16,451.09 773.62,451.09 ; 773.62,453.06 687.01,453.06 687.01,464.87 647.64,464.87 647.64,612.51 685.04,612.51 685.04,665.66 773.62,665.66 ; 549.21,269.68 555.12,271.65 566.93,283.46 566.93,287.4 549.21,269.68
  text "U" at 106.3,1460.63 h59.06
  text "V" at 379.92,1458.66 h59.06
  text "W" at 604.33,1456.69 h59.06
  text "SWD" at 681.1,590.85 h47.24 r90
  text "HALL" at 173.23,291.34 h51.18
M1-Board Shape:
  lines w3.94: -0.07,206.69 -0.07,918.31 ; 0,206.69 0,19.68 ccw(c19.69,19.68) 19.69,0 767.72,0 ccw(c767.72,19.68) 787.4,19.69 787.4,1594.49 ccw(c767.72,1594.49) 767.72,1614.17 19.69,1614.17 ccw(c19.69,1594.49) 0,1594.49 0,917.32

## Dimensions
0,19.68 to 787.4,19.68 on M2-Board Dimensions
696.85,0 to 692.91,1614.17 on M2-Board Dimensions

## Text inside footprints (layer, text, board x,y; h text height)
C3: M14-Top Assembly "1" at 181.61,514.37 h27.56 r180; M14-Top Assembly "2" at 157.01,514.37 h27.56 r180
C4: M14-Top Assembly "2" at 587.63,483.27 h27.56 r90; M14-Top Assembly "1" at 587.63,458.66 h27.56 r90
C5: M15-Bottom Assembly "1" at 617.37,314.11 h27.56 r270; M15-Bottom Assembly "2" at 617.37,338.72 h27.56 r270
C6: M15-Bottom Assembly "1" at 695.72,280.77 h27.56 r180; M15-Bottom Assembly "2" at 720.32,280.77 h27.56 r180
C7: M14-Top Assembly "1" at 484.81,603.35 h27.56 r180; M14-Top Assembly "2" at 460.2,603.35 h27.56 r180
C8: M14-Top Assembly "1" at 399.61,603.35 h27.56 r180; M14-Top Assembly "2" at 375,603.35 h27.56 r180
C9: M14-Top Assembly "1" at 299.79,603.35 h27.56 r180; M14-Top Assembly "2" at 275.18,603.35 h27.56 r180
C18: M15-Bottom Assembly "1" at 280.51,495.67 h27.56 r90; M15-Bottom Assembly "2" at 280.51,471.06 h27.56 r90
C19: M15-Bottom Assembly "1" at 160.43,532.48 h39.37 r180; M15-Bottom Assembly "2" at 202.76,532.48 h39.37 r180
C20: M15-Bottom Assembly "1" at 575.79,582.61 h27.56 r90; M15-Bottom Assembly "2" at 575.79,558.01 h27.56 r90
C21: M15-Bottom Assembly "2" at 146.65,715.55 h27.56; M15-Bottom Assembly "1" at 171.26,715.55 h27.56
C23: M15-Bottom Assembly "2" at 146.65,749.67 h27.56; M15-Bottom Assembly "1" at 171.26,749.67 h27.56
C24: M15-Bottom Assembly "2" at 597.44,878.94 h27.56 r180; M15-Bottom Assembly "1" at 572.83,878.94 h27.56 r180
C25: M15-Bottom Assembly "2" at 460.28,930.51 h27.56 r270; M15-Bottom Assembly "1" at 460.28,905.91 h27.56 r270
C26: M15-Bottom Assembly "2" at 489.73,930.51 h27.56 r270; M15-Bottom Assembly "1" at 489.73,905.91 h27.56 r270
C27: M15-Bottom Assembly "1" at 444.29,22.64 h39.37 r270; M15-Bottom Assembly "2" at 445.28,84.65 h39.37 r270
C28: M15-Bottom Assembly "1" at 534.87,215.55 h39.37 r90; M15-Bottom Assembly "2" at 533.88,153.54 h39.37 r90
C29: M15-Bottom Assembly "1" at 509.65,22.64 h39.37 r270; M15-Bottom Assembly "2" at 510.63,84.65 h39.37 r270
C30: M15-Bottom Assembly "1" at 248.23,22.64 h39.37 r270; M15-Bottom Assembly "2" at 249.21,84.65 h39.37 r270
C31: M15-Bottom Assembly "1" at 273.45,215.55 h39.37 r90; M15-Bottom Assembly "2" at 272.46,153.54 h39.37 r90
C32: M15-Bottom Assembly "1" at 338.8,215.55 h39.37 r90; M15-Bottom Assembly "2" at 337.82,153.54 h39.37 r90
C33: M15-Bottom Assembly "1" at 575,22.64 h39.37 r270; M15-Bottom Assembly "2" at 575.98,84.65 h39.37 r270
C34: M15-Bottom Assembly "2" at 183.86,84.65 h39.37 r270; M15-Bottom Assembly "1" at 182.87,22.64 h39.37 r270
C35: M15-Bottom Assembly "1" at 404.16,215.55 h39.37 r90; M15-Bottom Assembly "2" at 403.17,153.54 h39.37 r90
C36: M15-Bottom Assembly "2" at 468.53,153.54 h39.37 r90; M15-Bottom Assembly "1" at 469.51,215.55 h39.37 r90
C37: M15-Bottom Assembly "1" at 313.58,22.64 h39.37 r270; M15-Bottom Assembly "2" at 314.57,84.65 h39.37 r270
C38: M15-Bottom Assembly "1" at 378.57,22.64 h39.37 r270; M15-Bottom Assembly "2" at 379.55,84.65 h39.37 r270
C39: M15-Bottom Assembly "1" at 600.59,215.55 h39.37 r90; M15-Bottom Assembly "2" at 599.61,153.54 h39.37 r90
C40: M15-Bottom Assembly "2" at 207.48,153.54 h39.37 r90; M15-Bottom Assembly "1" at 208.46,215.55 h39.37 r90
C41: M14-Top Assembly "1" at 193.9,327.76 h39.37 r180; M14-Top Assembly "2" at 149.61,327.76 h39.37 r180
C44: M14-Top Assembly "1" at 229.33,265.75 h39.37 r180; M14-Top Assembly "2" at 121.06,265.75 h39.37 r180
C45: M14-Top Assembly "2" at 342.52,384.84 h39.37 r90; M14-Top Assembly "1" at 342.52,276.57 h39.37 r90
C55: M14-Top Assembly "1" at 180.12,782.48 h39.37; M14-Top Assembly "2" at 224.41,782.48 h39.37
C63: M14-Top Assembly "1" at 503.97,449.8 h27.56; M14-Top Assembly "2" at 528.57,449.8 h27.56
C64: M14-Top Assembly "2" at 530.51,235.24 h27.56; M14-Top Assembly "1" at 505.91,235.24 h27.56
C66: M15-Bottom Assembly "2" at 579.72,752.95 h27.56 r90; M15-Bottom Assembly "1" at 579.72,777.56 h27.56 r90
C67: M15-Bottom Assembly "2" at 511.92,392.26 h27.56 r90; M15-Bottom Assembly "1" at 511.92,416.87 h27.56 r90
C68: M15-Bottom Assembly "1" at 366.69,416.87 h27.56 r90; M15-Bottom Assembly "2" at 366.69,392.26 h27.56 r90
C69: M15-Bottom Assembly "1" at 257.76,416.87 h27.56 r90; M15-Bottom Assembly "2" at 257.76,392.26 h27.56 r90
C70: M15-Bottom Assembly "1" at 221.46,416.87 h27.56 r90; M15-Bottom Assembly "2" at 221.46,392.26 h27.56 r90
D4: M14-Top Assembly "A" at 85.63,732.28 h19.68; M14-Top Assembly "C" at 60.04,731.3 h19.68
D5: M14-Top Assembly "C" at 61.02,682.09 h19.68; M14-Top Assembly "A" at 85.63,683.07 h19.68
J3: M14-Top Assembly "4" at 450.79,20.67 h39.37; M14-Top Assembly "5" at 526.57,20.67 h39.37; M14-Top Assembly "3" at 377.95,21.65 h39.37; M14-Top Assembly "2" at 302.17,20.67 h39.37; M14-Top Assembly "1" at 232.28,20.67 h39.37
J4: M15-Bottom Assembly "4" at 752.95,490.16 h39.37 r90; M15-Bottom Assembly "3" at 752.95,543.31 h39.37 r90; M15-Bottom Assembly "2" at 752.95,596.46 h39.37 r90; M15-Bottom Assembly "1" at 752.95,645.67 h39.37 r90
J5: M14-Top Assembly "1" at 703.74,73.82 h39.37
J6: M14-Top Assembly "1" at 73.82,73.82 h39.37
J7: M14-Top Assembly "3" at 139.61,1557.09 h39.37 r270; M14-Top Assembly "2" at 383.7,1557.09 h39.37 r270; M14-Top Assembly "1" at 627.8,1557.09 h39.37 r270
J8: M15-Bottom Assembly "1" at 529.53,292.32 h39.37; M15-Bottom Assembly "4" at 311.02,292.32 h39.37; M15-Bottom Assembly "5" at 235.24,292.32 h39.37; M15-Bottom Assembly "2" at 459.65,292.32 h39.37; M15-Bottom Assembly "3" at 383.86,293.31 h39.37
JP1: M15-Bottom Assembly "1" at 127.95,1200.91 h19.68 r90; M15-Bottom Assembly "2" at 127.95,1178.28 h19.68 r90
JP2: M15-Bottom Assembly "1" at 399.61,1200.91 h19.68 r90; M15-Bottom Assembly "2" at 399.61,1178.28 h19.68 r90
JP3: M15-Bottom Assembly "1" at 664.39,1200.91 h19.68 r90; M15-Bottom Assembly "2" at 664.39,1178.28 h19.68 r90
L1: M15-Bottom Assembly "2" at 518.2,904.92 h29.53 r270; M15-Bottom Assembly "1" at 518.2,934.45 h29.53 r270
R1: M14-Top Assembly "1" at 722.42,208.65 h39.37 r90; M14-Top Assembly "2" at 720.46,438.96 h39.37 r90
R2: M14-Top Assembly "1" at 275.06,372.29 h29.53 r90; M14-Top Assembly "2" at 275.06,396.9 h29.53 r90
R3: M15-Bottom Assembly "1" at 700.94,419.05 h29.53 r180; M15-Bottom Assembly "2" at 725.54,419.05 h29.53 r180
R4: M15-Bottom Assembly "2" at 187.01,935.04 h29.53 r270; M15-Bottom Assembly "1" at 187.01,910.43 h29.53 r270
R5: M14-Top Assembly "1" at 500.39,658.02 h29.53; M14-Top Assembly "2" at 525,658.02 h29.53
R6: M14-Top Assembly "1" at 230.9,693.27 h29.53 r180; M14-Top Assembly "2" at 206.3,693.27 h29.53 r180
R7: M14-Top Assembly "1" at 498.46,697.91 h29.53; M14-Top Assembly "2" at 523.07,697.91 h29.53
R8: M14-Top Assembly "1" at 230.9,723.31 h29.53 r180; M14-Top Assembly "2" at 206.3,723.31 h29.53 r180
R9: M14-Top Assembly "1" at 230.9,631.73 h29.53 r180; M14-Top Assembly "2" at 206.3,631.73 h29.53 r180
R10: M14-Top Assembly "1" at 230.9,753.36 h29.53 r180; M14-Top Assembly "2" at 206.3,753.36 h29.53 r180
R11: M15-Bottom Assembly "1" at 368.11,912.8 h29.53 r270; M15-Bottom Assembly "2" at 368.11,937.4 h29.53 r270
R12: M15-Bottom Assembly "1" at 571.85,848.43 h29.53 r180; M15-Bottom Assembly "2" at 596.46,848.43 h29.53 r180
R28: M14-Top Assembly "1" at 60.04,769.69 h29.53; M14-Top Assembly "2" at 84.65,769.69 h29.53
R29: M14-Top Assembly "1" at 60.04,635.83 h29.53; M14-Top Assembly "2" at 84.65,635.83 h29.53
R30: M14-Top Assembly "2" at 24.61,386.81 h29.53 r270; M14-Top Assembly "1" at 24.61,411.42 h29.53 r270
R33: M14-Top Assembly "1" at 59.06,411.42 h29.53 r270; M14-Top Assembly "2" at 59.06,386.81 h29.53 r270
R35: M15-Bottom Assembly "1" at 187.01,1000.98 h29.53 r270; M15-Bottom Assembly "2" at 187.01,1025.59 h29.53 r270
R39: M15-Bottom Assembly "1" at 41.34,1373.03 h29.53 r90; M15-Bottom Assembly "2" at 41.34,1348.43 h29.53 r90
R41: M15-Bottom Assembly "1" at 476.38,1000.98 h29.53 r270; M15-Bottom Assembly "2" at 476.38,1025.59 h29.53 r270
R45: M15-Bottom Assembly "1" at 289.37,1373.03 h29.53 r90; M15-Bottom Assembly "2" at 289.37,1348.43 h29.53 r90
R48: M15-Bottom Assembly "1" at 734.25,1000.98 h29.53 r270; M15-Bottom Assembly "2" at 734.25,1025.59 h29.53 r270
R52: M15-Bottom Assembly "1" at 557.09,1373.03 h29.53 r90; M15-Bottom Assembly "2" at 557.09,1348.43 h29.53 r90
R54: M15-Bottom Assembly "2" at 137.8,1114.17 h39.37 r90; M15-Bottom Assembly "1" at 139.76,1344.49 h39.37 r90
R55: M15-Bottom Assembly "2" at 407.48,1114.17 h39.37 r90; M15-Bottom Assembly "1" at 409.45,1344.49 h39.37 r90
R56: M15-Bottom Assembly "2" at 669.29,1114.17 h39.37 r90; M15-Bottom Assembly "1" at 671.26,1344.49 h39.37 r90
R57: M15-Bottom Assembly "1" at 361.49,461.61 h29.53 r270; M15-Bottom Assembly "2" at 361.49,486.22 h29.53 r270
R58: M15-Bottom Assembly "1" at 400.86,461.61 h29.53 r270; M15-Bottom Assembly "2" at 400.86,486.22 h29.53 r270
R59: M15-Bottom Assembly "1" at 436.29,461.61 h29.53 r270; M15-Bottom Assembly "2" at 436.29,486.22 h29.53 r270
R60: M15-Bottom Assembly "2" at 620.08,753.94 h29.53 r90; M15-Bottom Assembly "1" at 620.08,778.54 h29.53 r90
R64: M15-Bottom Assembly "1" at 94.67,782.81 h29.53; M15-Bottom Assembly "2" at 70.06,782.81 h29.53
R65: M15-Bottom Assembly "2" at 250,901.79 h29.53; M15-Bottom Assembly "1" at 274.61,901.79 h29.53
R66: M15-Bottom Assembly "1" at 304.13,921.47 h29.53 r180; M15-Bottom Assembly "2" at 328.74,921.47 h29.53 r180
R67: M15-Bottom Assembly "1" at 94.67,816.93 h29.53; M15-Bottom Assembly "2" at 70.06,816.93 h29.53
R68: M15-Bottom Assembly "2" at 159.45,836.61 h29.53 r180; M15-Bottom Assembly "1" at 134.84,836.61 h29.53 r180
R69: M15-Bottom Assembly "2" at 250,974.41 h29.53; M15-Bottom Assembly "1" at 274.61,974.41 h29.53
R70: M15-Bottom Assembly "2" at 328.74,994.09 h29.53 r180; M15-Bottom Assembly "1" at 304.13,994.09 h29.53 r180
R71: M15-Bottom Assembly "2" at 456.91,405.06 h29.53 r270; M15-Bottom Assembly "1" at 456.91,380.45 h29.53 r270
R72: M15-Bottom Assembly "1" at 384.3,380.45 h29.53 r270; M15-Bottom Assembly "2" at 384.3,405.06 h29.53 r270
R73: M15-Bottom Assembly "1" at 295.06,417.85 h29.53 r90; M15-Bottom Assembly "2" at 295.06,393.24 h29.53 r90
R74: M15-Bottom Assembly "2" at 529.53,405.06 h29.53 r270; M15-Bottom Assembly "1" at 529.53,380.45 h29.53 r270
R75: M15-Bottom Assembly "1" at 420.6,380.45 h29.53 r270; M15-Bottom Assembly "2" at 420.6,405.06 h29.53 r270
R76: M15-Bottom Assembly "2" at 147.64,782.81 h29.53; M15-Bottom Assembly "1" at 172.24,782.81 h29.53
R77: M15-Bottom Assembly "1" at 331.36,417.85 h29.53 r90; M15-Bottom Assembly "2" at 331.36,393.24 h29.53 r90
R80: M15-Bottom Assembly "1" at 57.27,768.37 h29.53 r180; M15-Bottom Assembly "2" at 81.87,768.37 h29.53 r180
R81: M15-Bottom Assembly "2" at 261.81,957.78 h29.53 r180; M15-Bottom Assembly "1" at 237.2,957.78 h29.53 r180
R82: M15-Bottom Assembly "1" at 341.54,937.01 h29.53; M15-Bottom Assembly "2" at 316.93,937.01 h29.53
RT1: M15-Bottom Assembly "2" at 596.46,913.57 h29.53 r180; M15-Bottom Assembly "1" at 571.85,913.57 h29.53 r180
U8: M15-Bottom Assembly "37" at 475.39,535.43 h29.53 r270; M15-Bottom Assembly "36" at 500.98,551.18 h29.53 r270; M15-Bottom Assembly "24" at 475.39,783.46 h29.53 r270; M15-Bottom Assembly "12" at 244.09,769.69 h29.53 r270; M15-Bottom Assembly "25" at 500.98,767.72 h29.53 r270; M15-Bottom Assembly "49" at 369.09,652.56 h39.37 r270; M15-Bottom Assembly "13" at 270.67,785.43 h29.53 r270; M15-Bottom Assembly "48" at 269.69,536.42 h29.53 r270; M15-Bottom Assembly "1" at 236.22,560.04 h29.53 r270
Y2: M15-Bottom Assembly "1" at 62.99,593.5 h39.37 r270; M15-Bottom Assembly "3" at 62.99,685.04 h39.37 r270; M15-Bottom Assembly "2" at 62.99,636.81 h39.37 r270